# Altium PCB ESP32_Component.PcbDoc (part 2 of 2)
Units mm, origin at the board's own origin, x right, y up, seen from the top; angles counter-clockwise.
Board outline 90.17 x 95.89 mm, 4 copper layers (L1 (Signal), L2 (Ground), L3 (Ground), L4 (Signal)), stack 1.591 mm thick; 69 components, 61 nets, 348 pads, 1237 vias.
Unrouted connection lines stored in the file: 1.
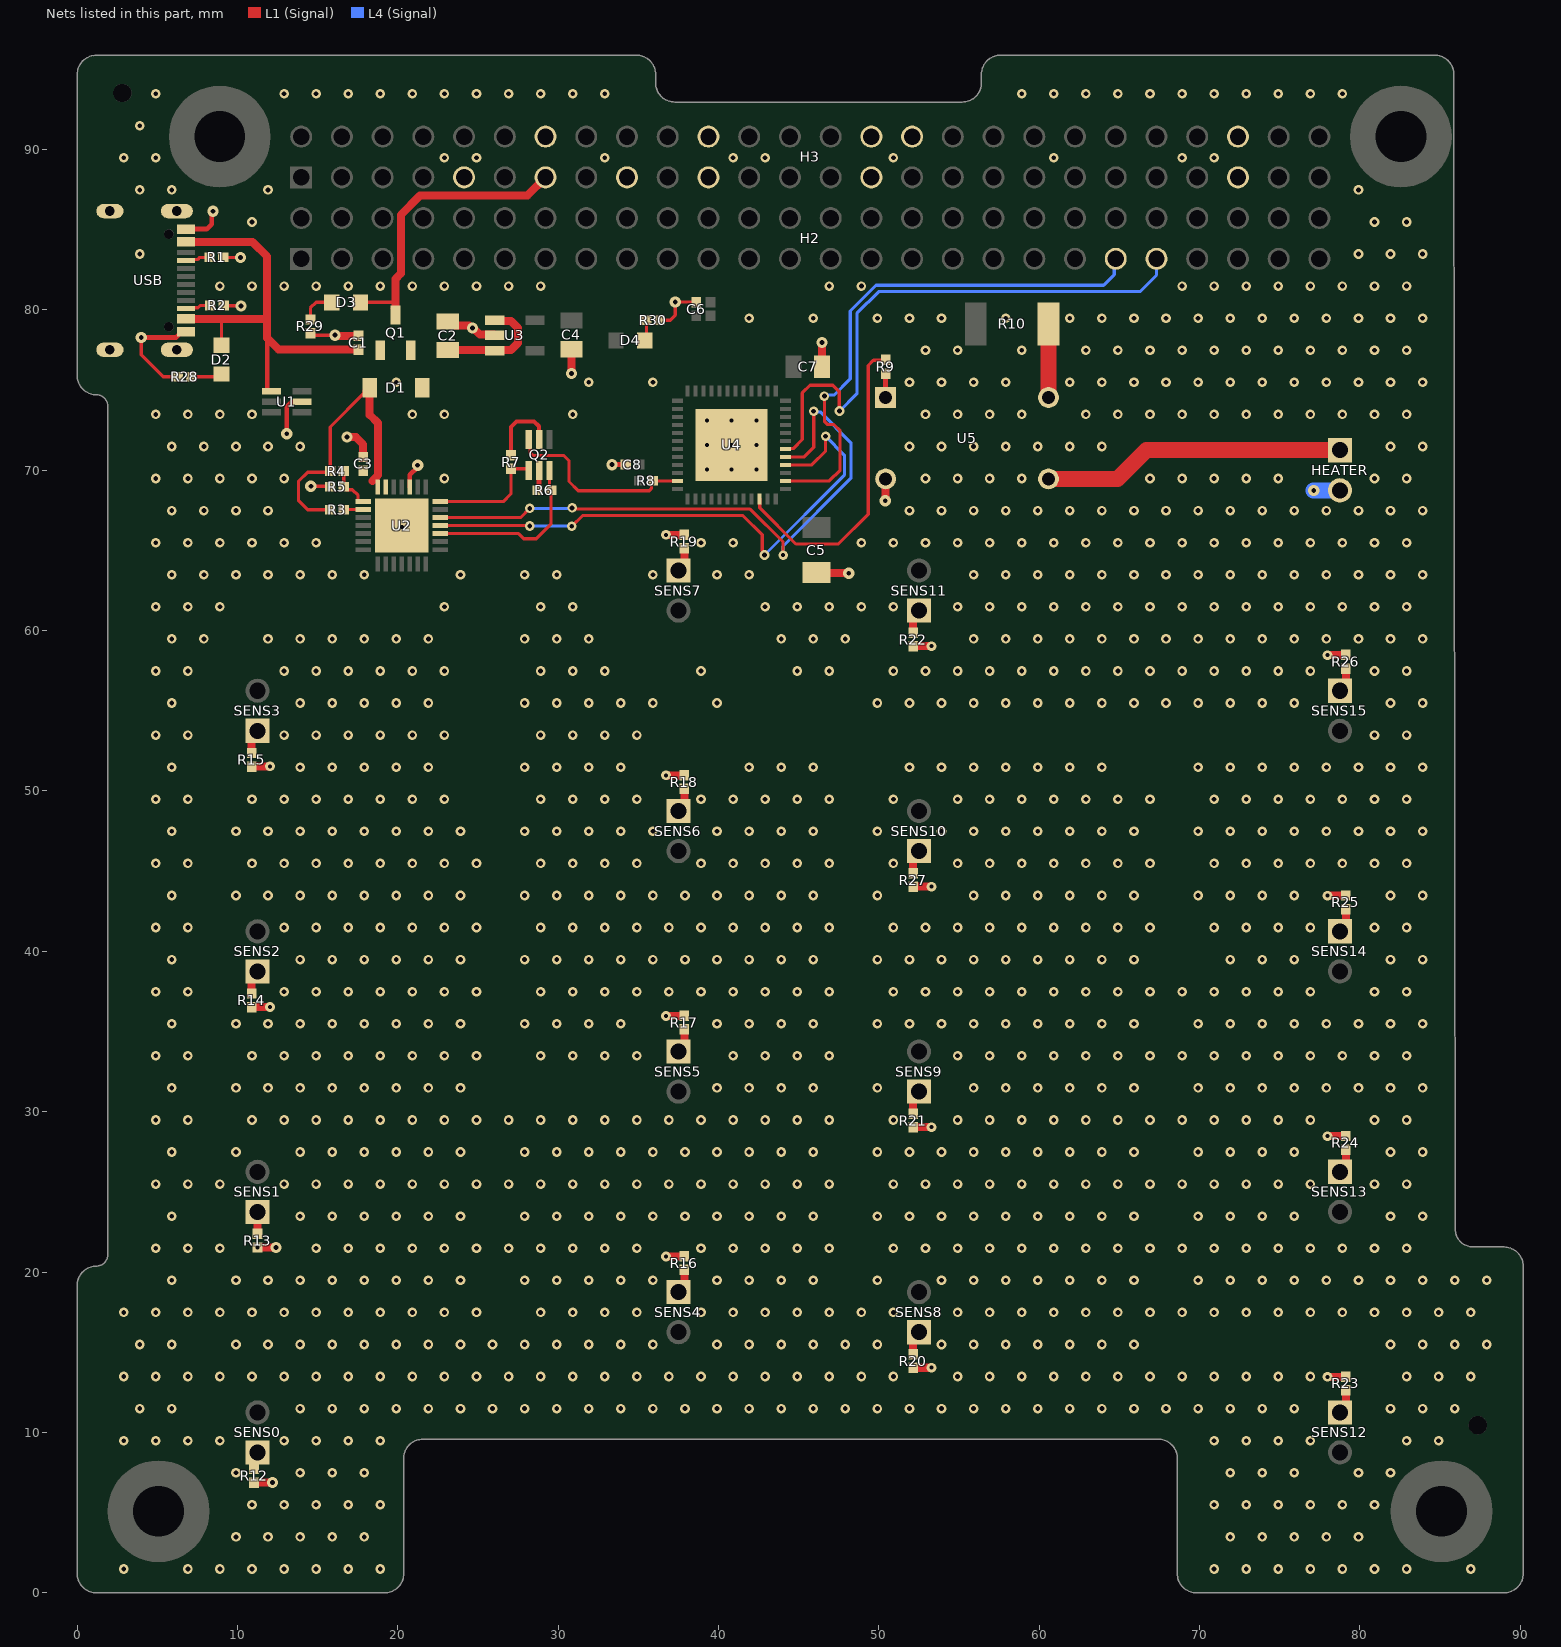
[diagram p4: the nets of this part, all layers, seen from the top]

## Via types
v1: diameter 0.6, hole 0.3, L1 (Signal) to L4 (Signal), tented both sides, 1149 vias
v2: diameter 0.6, hole 0.3, L1 (Signal) to L4 (Signal), 43 vias
v3: diameter 0.6, hole 0.25, L1 (Signal) to L4 (Signal), 26 vias
v4: diameter 0.7, hole 0.3, L1 (Signal) to L4 (Signal), 19 vias

## Nets (pads, with @x,y where several pads share a name; then routed paths per layer and width w, separated by ;. In a path a pad name is that pad's centre, name@x,y a point inside that pad or via, vN(x,y) a via of type N, cw(c..) or ccw(c..) an arc to the next point about the centre after c; other vN are vias at no path point) (continued)
GND: C1.2 C2.1 C3.2 C4.1 C5.2 C6.1 C7.1 C8.1 H3.09 H3.14 H3.17 H3.21 H3.22 H3.29 H3.30 H3.32 H3.47 H3.48 HEATER.2 R1.1 R2.1 R5.1 R12.2 R13.1 R14.1 R15.1 R16.1 R17.1 R18.1 R19.1 R20.1 R21.1 R22.1 R23.1 R24.1 R25.1 R26.1 R27.1 R28.1 R29.1 R30.1 U1.2 U2.3 U2.29 U3.2 U4.49 U5.2 USB.A1_B12 USB.B1_A12 USB.S1 USB.S2 USB.S3 USB.S4 | length 56
  L1 (Signal) w0.2: v4(4,78.275) 4,77.2 5.375,75.825 R28.1@6.275,75.825 ; R1.1@9.132,83.268 v4@10.179,83.268 ; R2.1@9.162,80.263 v4@10.212,80.263 ; R29.1@14.55,78.55 14.675,78.425 v4(16.075,78.425) ; v4(14.575,69) 15.746,69 R5.1@15.786,68.961 ; R30.1@36.35,79.35 36.358,79.358 36.983,79.358 37.3,79.675 v4(37.3,80.49) ; v4@37.31,80.49 38.597,80.49 C6.1@38.608,80.479
  L1 (Signal) w0.3: v4(4,78.275) 6.161,78.275 6.525,78.639 USB.B1_A12@6.795,78.639 ; USB.A1_B12@6.795,85.039 8.089,85.039 8.398,85.348 8.398,86.073 v4(8.475,86.15) ; R1.1@9.125,83.275 R1.1@9.132,83.268 ; R2.1@9.15,80.275 R2.1@9.162,80.263 ; v4@10.179,83.268 v4(10.186,83.261) ; v4@10.212,80.263 v4(10.225,80.25) ; v4(13.075,72.275) 13.075,73.955 13.345,74.225 13.985,74.225 U1.2@14.035,74.275 ; U2.3@20.744,68.948 20.744,69.708 21.234,70.199 v4(21.234,70.307) ; v4(33.351,70.35) 33.355,70.354 C8.1@34.198,70.354
  L1 (Signal) w0.5: R14.1@10.876,36.532 v3(12.026,36.532) ; R15.1@10.876,51.532 v3(12.026,51.532) ; R12.2@11.03,6.869 v4(12.18,6.869) ; v3(11.25,21.532) v4(12.4,21.532) ; v4(16.075,78.425) 16.129,78.425 16.177,78.378 C1.2@17.545,78.378 ; v4(16.825,72.075) 16.828,72.072 17.378,72.072 17.831,71.619 C3.2@17.831,70.827 ; C2.1@23.125,79.289 23.375,79.039 24.432,79.039 24.596,78.875 v4(24.65,78.875) 24.704,78.875 25.124,78.455 25.998,78.455 U3.2@26.043,78.41 ; v4@30.825,76.036 C4.1@30.825,77.542 ; C8.1@34.198,70.354 C8.1@34.202,70.358 ; v3(36.724,20.968) R16.1@37.874,20.968 ; v3(36.724,35.968) R17.1@37.874,35.968 ; v3(36.724,50.968) R18.1@37.874,50.968 ; v3(36.724,65.968) R19.1@37.874,65.968 ; C5.2@46.101,63.621 46.122,63.601 48.099,63.601 v4(48.12,63.58) ; v4(46.45,77.975) 46.451,77.974 46.451,76.453 C7.1@46.452,76.452 ; v4(50.396,68.095) 50.408,68.107 50.408,69.448 U5.2@50.42,69.46 ; R20.1@52.126,14.032 v3(53.276,14.032) ; R21.1@52.126,29.032 v3(53.276,29.032) ; R27.1@52.126,44.032 v3(53.276,44.032) ; R22.1@52.126,59.032 v3(53.276,59.032) ; v3(77.974,13.468) R23.1@79.124,13.468 ; v3(77.974,28.468) R24.1@79.124,28.468 ; v3(77.974,43.468) R25.1@79.124,43.468 ; v3(77.974,58.468) R26.1@79.124,58.468
  L1 (Signal) w1: HEATER.2@78.732,68.732 HEATER.2@78.75,68.75
  L4 (Signal) w1: v4(77.114,68.732) HEATER.2@78.732,68.732
  other v1: 2.905,1.482 6.905,1.482 8.905,1.482 10.905,1.482 12.905,1.482 14.905,1.482 16.905,1.482 18.905,1.482 70.905,1.482 72.905,1.482 74.905,1.482 76.905,1.482 78.905,1.482 80.905,1.482 82.905,1.482 86.905,1.482 9.905,3.482 11.905,3.482 13.905,3.482 15.905,3.482 17.905,3.482 71.905,3.482 73.905,3.482 75.905,3.482 77.905,3.482 79.905,3.482 10.905,5.482 12.905,5.482 14.905,5.482 16.905,5.482 18.905,5.482 70.905,5.482 72.905,5.482 74.905,5.482 76.905,5.482 78.905,5.482 80.905,5.482 9.905,7.482 13.905,7.482 15.905,7.482 17.905,7.482 71.905,7.482 73.905,7.482 75.905,7.482 79.905,7.482 81.905,7.482 2.905,9.482 4.905,9.482 6.905,9.482 8.905,9.482 12.905,9.482 14.905,9.482 16.905,9.482 18.905,9.482 70.905,9.482 72.905,9.482 74.905,9.482 76.905,9.482 82.905,9.482 84.905,9.482 3.905,11.482 5.905,11.482 13.905,11.482 15.905,11.482 17.905,11.482 19.905,11.482 21.905,11.482 23.905,11.482 25.905,11.482 27.905,11.482 29.905,11.482 31.905,11.482 33.905,11.482 35.905,11.482 37.905,11.482 39.905,11.482 41.905,11.482 43.905,11.482 45.905,11.482 47.905,11.482 49.905,11.482 51.905,11.482 53.905,11.482 55.905,11.482 57.905,11.482 59.905,11.482 61.905,11.482 63.905,11.482 65.905,11.482 67.905,11.482 69.905,11.482 71.905,11.482 73.905,11.482 75.905,11.482 81.905,11.482 83.905,11.482 85.905,11.482 2.905,13.482 4.905,13.482 6.905,13.482 8.905,13.482 10.905,13.482 12.905,13.482 14.905,13.482 16.905,13.482 18.905,13.482 20.905,13.482 22.905,13.482 24.905,13.482 26.905,13.482 28.905,13.482 30.905,13.482 32.905,13.482 34.905,13.482 36.905,13.482 38.905,13.482 40.905,13.482 42.905,13.482 44.905,13.482 46.905,13.482 48.905,13.482 50.905,13.482 54.905,13.482 56.905,13.482 58.905,13.482 60.905,13.482 62.905,13.482 64.905,13.482 66.905,13.482 68.905,13.482 70.905,13.482 72.905,13.482 74.905,13.482 76.905,13.482 82.905,13.482 84.905,13.482 86.905,13.482 3.905,15.482 5.905,15.482 9.905,15.482 11.905,15.482 13.905,15.482 15.905,15.482 17.905,15.482 19.905,15.482 21.905,15.482 23.905,15.482 25.905,15.482 27.905,15.482 29.905,15.482 31.905,15.482 33.905,15.482 35.905,15.482 39.905,15.482 41.905,15.482 43.905,15.482 45.905,15.482 47.905,15.482 49.905,15.482 53.905,15.482 55.905,15.482 57.905,15.482 59.905,15.482 61.905,15.482 63.905,15.482 65.905,15.482 81.905,15.482 83.905,15.482 85.905,15.482 87.905,15.482 2.905,17.482 4.905,17.482 6.905,17.482 8.905,17.482 10.905,17.482 12.905,17.482 14.905,17.482 16.905,17.482 18.905,17.482 20.905,17.482 22.905,17.482 24.905,17.482 28.905,17.482 30.905,17.482 32.905,17.482 34.905,17.482 38.905,17.482 40.905,17.482 42.905,17.482 44.905,17.482 46.905,17.482 48.905,17.482 50.905,17.482 54.905,17.482 56.905,17.482 58.905,17.482 60.905,17.482 62.905,17.482 64.905,17.482 66.905,17.482 68.905,17.482 70.905,17.482 72.905,17.482 74.905,17.482 76.905,17.482 78.905,17.482 80.905,17.482 82.905,17.482 84.905,17.482 86.905,17.482 5.905,19.482 9.905,19.482 11.905,19.482 13.905,19.482 15.905,19.482 17.905,19.482 19.905,19.482 21.905,19.482 23.905,19.482 27.905,19.482 29.905,19.482 31.905,19.482 33.905,19.482 35.905,19.482 39.905,19.482 41.905,19.482 43.905,19.482 45.905,19.482 49.905,19.482 53.905,19.482 55.905,19.482 57.905,19.482 59.905,19.482 61.905,19.482 63.905,19.482 65.905,19.482 69.905,19.482 71.905,19.482 73.905,19.482 75.905,19.482 77.905,19.482 79.905,19.482 81.905,19.482 83.905,19.482 85.905,19.482 87.905,19.482 4.905,21.482 6.905,21.482 8.905,21.482 14.905,21.482 16.905,21.482 18.905,21.482 20.905,21.482 22.905,21.482 24.905,21.482 26.905,21.482 28.905,21.482 30.905,21.482 32.905,21.482 34.905,21.482 38.905,21.482 40.905,21.482 42.905,21.482 44.905,21.482 46.905,21.482 50.905,21.482 52.905,21.482 54.905,21.482 56.905,21.482 58.905,21.482 60.905,21.482 62.905,21.482 64.905,21.482 66.905,21.482 68.905,21.482 70.905,21.482 72.905,21.482 74.905,21.482 76.905,21.482 78.905,21.482 80.905,21.482 82.905,21.482 5.905,23.482 13.905,23.482 15.905,23.482 17.905,23.482 19.905,23.482 21.905,23.482 23.905,23.482 27.905,23.482 29.905,23.482 31.905,23.482 33.905,23.482 35.905,23.482 37.905,23.482 39.905,23.482 41.905,23.482 43.905,23.482 45.905,23.482 49.905,23.482 51.905,23.482 53.905,23.482 55.905,23.482 57.905,23.482 59.905,23.482 61.905,23.482 63.905,23.482 65.905,23.482 69.905,23.482 71.905,23.482 73.905,23.482 75.905,23.482 81.905,23.482 83.905,23.482 4.905,25.482 6.905,25.482 8.905,25.482 12.905,25.482 14.905,25.482 16.905,25.482 18.905,25.482 20.905,25.482 22.905,25.482 24.905,25.482 26.905,25.482 28.905,25.482 30.905,25.482 32.905,25.482 34.905,25.482 36.905,25.482 38.905,25.482 40.905,25.482 42.905,25.482 44.905,25.482 46.905,25.482 50.905,25.482 52.905,25.482 54.905,25.482 56.905,25.482 58.905,25.482 60.905,25.482 62.905,25.482 64.905,25.482 66.905,25.482 68.905,25.482 70.905,25.482 72.905,25.482 74.905,25.482 76.905,25.482 80.905,25.482 82.905,25.482 5.905,27.482 9.905,27.482 13.905,27.482 15.905,27.482 17.905,27.482 19.905,27.482 21.905,27.482 23.905,27.482 27.905,27.482 29.905,27.482 31.905,27.482 33.905,27.482 35.905,27.482 37.905,27.482 39.905,27.482 41.905,27.482 43.905,27.482 45.905,27.482 49.905,27.482 51.905,27.482 53.905,27.482 55.905,27.482 57.905,27.482 59.905,27.482 61.905,27.482 63.905,27.482 65.905,27.482 69.905,27.482 71.905,27.482 73.905,27.482 75.905,27.482 81.905,27.482 83.905,27.482 4.905,29.482 6.905,29.482 10.905,29.482 12.905,29.482 14.905,29.482 16.905,29.482 18.905,29.482 20.905,29.482 22.905,29.482 24.905,29.482 26.905,29.482 28.905,29.482 30.905,29.482 32.905,29.482 34.905,29.482 36.905,29.482 38.905,29.482 40.905,29.482 42.905,29.482 44.905,29.482 46.905,29.482 50.905,29.482 54.905,29.482 56.905,29.482 58.905,29.482 60.905,29.482 62.905,29.482 64.905,29.482 66.905,29.482 68.905,29.482 70.905,29.482 72.905,29.482 74.905,29.482 76.905,29.482 80.905,29.482 82.905,29.482 5.905,31.482 9.905,31.482 11.905,31.482 13.905,31.482 15.905,31.482 17.905,31.482 19.905,31.482 21.905,31.482 23.905,31.482 39.905,31.482 41.905,31.482 43.905,31.482 45.905,31.482 49.905,31.482 55.905,31.482 57.905,31.482 59.905,31.482 61.905,31.482 63.905,31.482 65.905,31.482 69.905,31.482 71.905,31.482 73.905,31.482 75.905,31.482 77.905,31.482 79.905,31.482 81.905,31.482 83.905,31.482 4.905,33.482 6.905,33.482 10.905,33.482 12.905,33.482 14.905,33.482 16.905,33.482 18.905,33.482 20.905,33.482 22.905,33.482 24.905,33.482 28.905,33.482 30.905,33.482 32.905,33.482 34.905,33.482 40.905,33.482 42.905,33.482 44.905,33.482 46.905,33.482 54.905,33.482 56.905,33.482 58.905,33.482 60.905,33.482 62.905,33.482 64.905,33.482 66.905,33.482 68.905,33.482 70.905,33.482 72.905,33.482 74.905,33.482 76.905,33.482 78.905,33.482 80.905,33.482 82.905,33.482 5.905,35.482 9.905,35.482 11.905,35.482 13.905,35.482 15.905,35.482 17.905,35.482 19.905,35.482 21.905,35.482 23.905,35.482 27.905,35.482 29.905,35.482 31.905,35.482 33.905,35.482 39.905,35.482 41.905,35.482 43.905,35.482 45.905,35.482 49.905,35.482 51.905,35.482 53.905,35.482 55.905,35.482 57.905,35.482 59.905,35.482 61.905,35.482 63.905,35.482 65.905,35.482 69.905,35.482 71.905,35.482 73.905,35.482 75.905,35.482 77.905,35.482 79.905,35.482 81.905,35.482 83.905,35.482 4.905,37.482 6.905,37.482 12.905,37.482 14.905,37.482 16.905,37.482 18.905,37.482 20.905,37.482 22.905,37.482 24.905,37.482 28.905,37.482 30.905,37.482 32.905,37.482 34.905,37.482 36.905,37.482 38.905,37.482 40.905,37.482 42.905,37.482 44.905,37.482 46.905,37.482 50.905,37.482 52.905,37.482 54.905,37.482 56.905,37.482 58.905,37.482 60.905,37.482 62.905,37.482 64.905,37.482 66.905,37.482 68.905,37.482 70.905,37.482 72.905,37.482 74.905,37.482 76.905,37.482 80.905,37.482 82.905,37.482 5.905,39.482 13.905,39.482 15.905,39.482 17.905,39.482 19.905,39.482 21.905,39.482 23.905,39.482 27.905,39.482 29.905,39.482 31.905,39.482 33.905,39.482 35.905,39.482 37.905,39.482 39.905,39.482 41.905,39.482 43.905,39.482 45.905,39.482 49.905,39.482 51.905,39.482 53.905,39.482 55.905,39.482 57.905,39.482 59.905,39.482 61.905,39.482 63.905,39.482 65.905,39.482 71.905,39.482 73.905,39.482 75.905,39.482 81.905,39.482 83.905,39.482 4.905,41.482 6.905,41.482 12.905,41.482 14.905,41.482 16.905,41.482 18.905,41.482 20.905,41.482 22.905,41.482 24.905,41.482 28.905,41.482 30.905,41.482 32.905,41.482 34.905,41.482 36.905,41.482 38.905,41.482 40.905,41.482 42.905,41.482 44.905,41.482 46.905,41.482 50.905,41.482 52.905,41.482 54.905,41.482 56.905,41.482 58.905,41.482 60.905,41.482 62.905,41.482 64.905,41.482 66.905,41.482 70.905,41.482 72.905,41.482 74.905,41.482 76.905,41.482 80.905,41.482 82.905,41.482 5.905,43.482 9.905,43.482 11.905,43.482 13.905,43.482 15.905,43.482 17.905,43.482 19.905,43.482 21.905,43.482 23.905,43.482 27.905,43.482 29.905,43.482 31.905,43.482 33.905,43.482 35.905,43.482 37.905,43.482 39.905,43.482 41.905,43.482 43.905,43.482 45.905,43.482 49.905,43.482 55.905,43.482 57.905,43.482 59.905,43.482 61.905,43.482 63.905,43.482 65.905,43.482 69.905,43.482 71.905,43.482 73.905,43.482 75.905,43.482 81.905,43.482 83.905,43.482 4.905,45.482 6.905,45.482 10.905,45.482 12.905,45.482 14.905,45.482 16.905,45.482 18.905,45.482 20.905,45.482 22.905,45.482 24.905,45.482 28.905,45.482 30.905,45.482 32.905,45.482 34.905,45.482 38.905,45.482 40.905,45.482 42.905,45.482 44.905,45.482 46.905,45.482 50.905,45.482 54.905,45.482 56.905,45.482 58.905,45.482 60.905,45.482 62.905,45.482 64.905,45.482 66.905,45.482 70.905,45.482 72.905,45.482 74.905,45.482 76.905,45.482 78.905,45.482 80.905,45.482 82.905,45.482 5.905,47.482 9.905,47.482 11.905,47.482 13.905,47.482 15.905,47.482 17.905,47.482 19.905,47.482 21.905,47.482 23.905,47.482 27.905,47.482 29.905,47.482 31.905,47.482 33.905,47.482 35.905,47.482 39.905,47.482 41.905,47.482 43.905,47.482 45.905,47.482 49.905,47.482 53.905,47.482 55.905,47.482 57.905,47.482 59.905,47.482 61.905,47.482 63.905,47.482 65.905,47.482 69.905,47.482 71.905,47.482 73.905,47.482 75.905,47.482 77.905,47.482 79.905,47.482 81.905,47.482 83.905,47.482 4.905,49.482 6.905,49.482 10.905,49.482 12.905,49.482 14.905,49.482 16.905,49.482 18.905,49.482 20.905,49.482 22.905,49.482 28.905,49.482 30.905,49.482 32.905,49.482 34.905,49.482 38.905,49.482 40.905,49.482 42.905,49.482 44.905,49.482 46.905,49.482 50.905,49.482 54.905,49.482 56.905,49.482 58.905,49.482 60.905,49.482 62.905,49.482 64.905,49.482 66.905,49.482 70.905,49.482 72.905,49.482 74.905,49.482 76.905,49.482 78.905,49.482 80.905,49.482 82.905,49.482 5.905,51.482 13.905,51.482 15.905,51.482 17.905,51.482 19.905,51.482 21.905,51.482 27.905,51.482 29.905,51.482 31.905,51.482 33.905,51.482 41.905,51.482 43.905,51.482 45.905,51.482 51.905,51.482 53.905,51.482 55.905,51.482 57.905,51.482 59.905,51.482 61.905,51.482 63.905,51.482 69.905,51.482 71.905,51.482 73.905,51.482 75.905,51.482 77.905,51.482 79.905,51.482 81.905,51.482 83.905,51.482 4.905,53.482 6.905,53.482 12.905,53.482 14.905,53.482 16.905,53.482 18.905,53.482 20.905,53.482 22.905,53.482 28.905,53.482 30.905,53.482 32.905,53.482 34.905,53.482 80.905,53.482 82.905,53.482 5.905,55.482 13.905,55.482 15.905,55.482 17.905,55.482 19.905,55.482 21.905,55.482 27.905,55.482 29.905,55.482 31.905,55.482 33.905,55.482 35.905,55.482 39.905,55.482 49.905,55.482 51.905,55.482 53.905,55.482 55.905,55.482 57.905,55.482 59.905,55.482 61.905,55.482 63.905,55.482 65.905,55.482 67.905,55.482 69.905,55.482 71.905,55.482 73.905,55.482 75.905,55.482 81.905,55.482 83.905,55.482 4.905,57.482 6.905,57.482 12.905,57.482 14.905,57.482 16.905,57.482 18.905,57.482 20.905,57.482 22.905,57.482 28.905,57.482 30.905,57.482 32.905,57.482 38.905,57.482 44.905,57.482 46.905,57.482 50.905,57.482 52.905,57.482 54.905,57.482 56.905,57.482 58.905,57.482 60.905,57.482 62.905,57.482 64.905,57.482 66.905,57.482 68.905,57.482 70.905,57.482 72.905,57.482 74.905,57.482 76.905,57.482 80.905,57.482 82.905,57.482 5.905,59.482 7.905,59.482 11.905,59.482 13.905,59.482 15.905,59.482 17.905,59.482 19.905,59.482 21.905,59.482 27.905,59.482 29.905,59.482 31.905,59.482 43.905,59.482 45.905,59.482 47.905,59.482 55.905,59.482 57.905,59.482 59.905,59.482 61.905,59.482 63.905,59.482 65.905,59.482 67.905,59.482 69.905,59.482 71.905,59.482 73.905,59.482 75.905,59.482 77.905,59.482 79.905,59.482 81.905,59.482 83.905,59.482 4.905,61.482 6.905,61.482 8.905,61.482 22.905,61.482 28.905,61.482 30.905,61.482 42.905,61.482 44.905,61.482 46.905,61.482 48.905,61.482 50.905,61.482 54.905,61.482 56.905,61.482 58.905,61.482 60.905,61.482 62.905,61.482 64.905,61.482 66.905,61.482 68.905,61.482 70.905,61.482 72.905,61.482 74.905,61.482 76.905,61.482 78.905,61.482 80.905,61.482 82.905,61.482 5.905,63.482 7.905,63.482 9.905,63.482 11.905,63.482 13.905,63.482 15.905,63.482 17.905,63.482 23.905,63.482 27.905,63.482 29.905,63.482 35.905,63.482 39.905,63.482 41.905,63.482 55.905,63.482 57.905,63.482 59.905,63.482 61.905,63.482 63.905,63.482 65.905,63.482 67.905,63.482 69.905,63.482 71.905,63.482 73.905,63.482 75.905,63.482 77.905,63.482 79.905,63.482 81.905,63.482 83.905,63.482 4.905,65.482 6.905,65.482 8.905,65.482 10.905,65.482 12.905,65.482 14.905,65.482 38.905,65.482 40.905,65.482 48.905,65.482 50.905,65.482 52.905,65.482 54.905,65.482 56.905,65.482 58.905,65.482 60.905,65.482 62.905,65.482 64.905,65.482 66.905,65.482 68.905,65.482 70.905,65.482 72.905,65.482 74.905,65.482 76.905,65.482 78.905,65.482 80.905,65.482 82.905,65.482 5.905,67.482 7.905,67.482 9.905,67.482 11.905,67.482 51.905,67.482 53.905,67.482 55.905,67.482 57.905,67.482 59.905,67.482 61.905,67.482 63.905,67.482 65.905,67.482 67.905,67.482 69.905,67.482 71.905,67.482 73.905,67.482 75.905,67.482 77.905,67.482 79.905,67.482 81.905,67.482 83.905,67.482 4.905,69.482 6.905,69.482 8.905,69.482 10.905,69.482 12.905,69.482 22.905,69.482 52.905,69.482 54.905,69.482 56.905,69.482 58.905,69.482 66.905,69.482 68.905,69.482 70.905,69.482 72.905,69.482 74.905,69.482 80.905,69.482 82.905,69.482 5.905,71.482 7.905,71.482 9.905,71.482 11.905,71.482 13.905,71.482 51.905,71.482 53.905,71.482 55.905,71.482 57.905,71.482 59.905,71.482 61.905,71.482 63.905,71.482 81.905,71.482 83.905,71.482 4.905,73.482 6.905,73.482 8.905,73.482 10.905,73.482 20.905,73.482 22.905,73.482 30.905,73.482 52.905,73.482 54.905,73.482 56.905,73.482 58.905,73.482 62.905,73.482 64.905,73.482 66.905,73.482 68.905,73.482 70.905,73.482 72.905,73.482 74.905,73.482 76.905,73.482 78.905,73.482 80.905,73.482 82.905,73.482 19.905,75.482 31.905,75.482 35.905,75.482 51.905,75.482 53.905,75.482 55.905,75.482 57.905,75.482 61.905,75.482 63.905,75.482 65.905,75.482 67.905,75.482 69.905,75.482 71.905,75.482 73.905,75.482 75.905,75.482 77.905,75.482 79.905,75.482 81.905,75.482 83.905,75.482 52.905,77.482 54.905,77.482 58.905,77.482 62.905,77.482 64.905,77.482 66.905,77.482 68.905,77.482 70.905,77.482 72.905,77.482 74.905,77.482 76.905,77.482 78.905,77.482 80.905,77.482 82.905,77.482 41.905,79.482 45.905,79.482 49.905,79.482 51.905,79.482 53.905,79.482 57.905,79.482 61.905,79.482 63.905,79.482 65.905,79.482 67.905,79.482 69.905,79.482 71.905,79.482 73.905,79.482 75.905,79.482 77.905,79.482 79.905,79.482 81.905,79.482 83.905,79.482 8.905,81.482 10.905,81.482 12.905,81.482 14.905,81.482 16.905,81.482 18.905,81.482 20.905,81.482 22.905,81.482 24.905,81.482 26.905,81.482 28.905,81.482 46.905,81.482 48.905,81.482 68.905,81.482 70.905,81.482 72.905,81.482 74.905,81.482 76.905,81.482 78.905,81.482 80.905,81.482 82.905,81.482 3.905,83.482 79.905,83.482 81.905,83.482 83.905,83.482 10.905,85.482 80.905,85.482 82.905,85.482 3.905,87.482 5.905,87.482 11.905,87.482 79.905,87.482 2.905,89.482 4.905,89.482 22.905,89.482 24.905,89.482 32.905,89.482 40.905,89.482 42.905,89.482 50.905,89.482 60.905,89.482 68.905,89.482 70.905,89.482 3.905,91.482 4.905,93.482 12.905,93.482 14.905,93.482 16.905,93.482 18.905,93.482 20.905,93.482 22.905,93.482 24.905,93.482 26.905,93.482 28.905,93.482 30.905,93.482 32.905,93.482 58.905,93.482 60.905,93.482 62.905,93.482 64.905,93.482 66.905,93.482 68.905,93.482 70.905,93.482 72.905,93.482 74.905,93.482 76.905,93.482 78.905,93.482
  other v3: 20.244,66.448 39.293,70.06 40.817,70.06 42.37,70.06 39.293,71.584 40.817,71.584 42.37,71.584 39.293,73.108 40.817,73.108 42.37,73.108
  other v4: 30.821,76.032
IO0: Q2.6 R8.1 U4.23 | length 12.3
  L1 (Signal) w0.2: Q2.6@28.16,71.912 28.233,71.839 28.233,71.117 28.436,70.914 30.361,70.914 30.675,70.6 30.675,69.3 31.253,68.722 35.672,68.722 35.809,68.859 35.809,69.249 R8.1@35.902,69.342 36.029,69.342 36.035,69.336 37.45,69.336 U4.23@37.452,69.334
Net2_8: R4.1 R5.2 U2.8 | length 2.8
  L1 (Signal) w0.2: R4.1@16.63,69.952 16.63,68.966 16.812,68.784 17.166,68.784 17.519,68.431 17.519,68.098 17.569,68.048 U2.8@17.844,68.048
Net2_9: R3.1 U2.9 | length 1.2
  L1 (Signal) w0.2: R3.1@16.637,67.539 16.646,67.548 U2.9@17.844,67.548
Net2_24: Q2.3 R6.2 U2.24 | length 10.8
  L1 (Signal) w0.2: U2.24@22.644,66.048 27.527,66.048 27.85,65.725 28.625,65.725 29.558,66.658 R6.2@29.558,68.742 29.46,68.84 Q2.3@29.46,69.992
Net2_28: Q2.1 R7.2 U2.28 | length 7.3
  L1 (Signal) w0.2: U2.28@22.644,68.048 26.573,68.048 27.055,68.53 27.055,70.086 R7.2@27.057,70.088 28.063,70.088 Q2.1@28.16,69.992
NetC2_2: C2.2 D1.1 Q1.2 U3.1 U3.3 | length 7.2
  L1 (Signal) w0.5: C2.2@23.125,77.511 23.151,77.485 26.018,77.485 U3.3@26.043,77.46 26.088,77.505 27.062,77.505 27.498,77.941 27.498,78.878 27.062,79.315 26.088,79.315 U3.1@26.043,79.36
NetD2_1: D2.1 R28.2 | length 1.9
  L1 (Signal) w0.2: R28.2@7.125,75.825 8.825,75.825 D2.1@9,76
NetD3_1: D3.1 R29.2 | length 2.2
  L1 (Signal) w0.2: R29.2@14.55,79.4 14.55,80.125 14.9,80.475 D3.1@15.875,80.475
NetD4_1: D4.1 R30.2 | length 1.3
  L1 (Signal) w0.2: D4.1@35.4,78.1 35.5,78.2 R30.2@35.5,79.35
NetH1_A5: R1.2 USB.A5 | length 1.6
  L1 (Signal) w0.2: USB.A5@6.795,83.089 6.845,83.139 7.514,83.139 7.65,83.275 R1.2@8.275,83.275
NetH1_B5: R2.2 USB.B5 | length 1.6
  L1 (Signal) w0.2: USB.B5@6.795,80.089 6.845,80.139 7.539,80.139 7.675,80.275 R2.2@8.3,80.275
NetH4_1: HEATER.1 U5.3 | length 18.9
  L1 (Signal) w1: U5.3@60.58,69.46 64.885,69.46 66.675,71.25 HEATER.1@78.75,71.25
NetH5_1: R12.1 SENS0.1 | length 1.8
  L1 (Signal) w0.5: R12.1@11.03,7.719 11.03,9.1 SENS0.1@11.4,9.1
NetH6_1: R13.2 SENS1.1 | length 1.8
  L1 (Signal) w0.5: R13.2@11.254,22.369 11.254,23.75 SENS1.1@11.624,23.75
NetH7_1: R14.2 SENS2.1 | length 1.8
  L1 (Signal) w0.5: R14.2@10.88,37.369 10.88,38.75 SENS2.1@11.25,38.75
NetH8_1: R15.2 SENS3.1 | length 1.8
  L1 (Signal) w0.5: R15.2@10.88,52.369 10.88,53.75 SENS3.1@11.25,53.75
NetH9_1: R16.2 SENS4.1 | length 1.8
  L1 (Signal) w0.5: SENS4.1@37.5,18.75 37.87,18.75 R16.2@37.87,20.131
NetH10_1: R17.2 SENS5.1 | length 1.8
  L1 (Signal) w0.5: SENS5.1@37.5,33.75 37.87,33.75 R17.2@37.87,35.131
NetH11_1: R18.2 SENS6.1 | length 1.8
  L1 (Signal) w0.5: SENS6.1@37.5,48.75 37.87,48.75 R18.2@37.87,50.131
NetH12_1: R19.2 SENS7.1 | length 1.8
  L1 (Signal) w0.5: SENS7.1@37.5,63.75 37.87,63.75 R19.2@37.87,65.131
NetH13_1: R20.2 SENS8.1 | length 1.8
  L1 (Signal) w0.5: R20.2@52.13,14.869 52.13,16.25 SENS8.1@52.5,16.25
NetH14_1: R21.2 SENS9.1 | length 1.8
  L1 (Signal) w0.5: R21.2@52.13,29.869 52.13,31.25 SENS9.1@52.5,31.25
NetH15_1: R27.2 SENS10.1 | length 1.8
  L1 (Signal) w0.5: R27.2@52.13,44.869 52.13,46.25 SENS10.1@52.5,46.25
NetH16_1: R22.2 SENS11.1 | length 1.5
  L1 (Signal) w0.5: R22.2@52.13,59.869 52.13,60.88 SENS11.1@52.5,61.25
NetH17_1: R23.2 SENS12.1 | length 1.8
  L1 (Signal) w0.5: SENS12.1@78.75,11.25 79.12,11.25 R23.2@79.12,12.631
NetH18_1: R24.2 SENS13.1 | length 1.8
  L1 (Signal) w0.5: SENS13.1@78.75,26.25 79.12,26.25 R24.2@79.12,27.631
NetH19_1: R25.2 SENS14.1 | length 1.8
  L1 (Signal) w0.5: SENS14.1@78.75,41.25 79.12,41.25 R25.2@79.12,42.631
NetH20_1: R26.2 SENS15.1 | length 1.8
  L1 (Signal) w0.5: SENS15.1@78.75,56.25 79.12,56.25 R26.2@79.12,57.631
NetQ2_2: Q2.2 R6.1 | length 1.3
  L1 (Signal) w0.3: R6.1@28.708,68.742 28.81,68.843 Q2.2@28.81,69.992
NetQ2_5: Q2.5 R7.1 | length 4.6
  L1 (Signal) w0.254: R7.1@27.057,70.938 27.057,72.699 27.408,73.05 28.5,73.05 28.806,72.744 28.806,71.916 Q2.5@28.81,71.912
NetR9_2: R9.2 U5.1 | length 1.5
  L1 (Signal) w0.3: R9.2@50.419,76.029 50.419,74.541 U5.1@50.42,74.54
NetR10_1: R10.1 U5.4 | length 4.6
  L1 (Signal) w1: U5.4@60.579,74.541 R10.1@60.579,79.121
PWM: R9.1 U4.34 | length 19.5
  L1 (Signal) w0.2: U4.34@42.567,68.219 42.567,67.658 44.825,65.4 47.476,65.4 49.334,67.258 49.334,76.534 49.654,76.854 50.394,76.854 R9.1@50.419,76.879
RXD: U2.25 U4.40 | length 35.9
  L1 (Signal) w0.2: U2.25@22.644,66.548 28.202,66.548 v2(28.23,66.52) ; v2(30.85,66.51) 31.519,67.179 41.521,67.179 42.725,65.975 42.725,64.966 42.866,64.825 v2(42.866,64.716) ; U4.40@44.182,70.334 44.184,70.332 45.807,70.332 46.674,71.199 v2(46.674,72.123)
  L4 (Signal) w0.2: v2(28.23,66.52) 28.235,66.515 30.845,66.515 v2(30.85,66.51) ; v2(42.866,64.716) 47.85,69.7 47.85,70.947 v2(46.674,72.123)
SCL: H2.43 U4.42 | length 35.3
  L1 (Signal) w0.2: U4.42@44.182,71.334 44.199,71.351 44.654,71.351 45.222,71.919 45.222,74.822 45.7,75.3 47.125,75.3 47.529,74.896 47.529,73.713 v2(47.545,73.696)
  L4 (Signal) w0.2: v2(47.545,73.696) 48.625,74.777 48.625,79.779 49.986,81.14 66.281,81.14 67.31,82.169 H2.43@67.31,83.185
SDA: H2.41 U4.38 | length 33.7
  L1 (Signal) w0.2: U4.38@44.182,69.334 46.909,69.334 47.58,70.005 47.58,72.47 47.2,72.85 46.8,72.85 46.6,73.05 v2(46.6,74.625)
  L4 (Signal) w0.2: v2(46.6,74.625) 46.665,74.69 47.2,74.69 48.21,75.7 48.21,79.93 49.82,81.54 64.014,81.54 64.674,82.2 64.674,83.089 H2.41@64.77,83.185
TXD: U2.26 U4.41 | length 39.5
  L1 (Signal) w0.2: U2.26@22.644,67.048 27.648,67.048 v2(28.22,67.62) ; v2(30.87,67.65) 30.941,67.579 41.969,67.579 44.025,65.524 v3(44.025,64.7) ; U4.41@44.182,70.834 45.338,70.834 45.932,71.428 45.932,73.668 v2(45.925,73.675)
  L4 (Signal) w0.2: v2(28.22,67.62) 30.84,67.62 v2(30.87,67.65) ; v3(44.025,64.7) 44.025,65.275 48.25,69.5 48.25,71.725 46.337,73.638 45.962,73.638 v2(45.925,73.675)
VBUS: D3.2 H3.13 Q1.3 | length 18.9
  L1 (Signal) w0.2: D3.2@17.675,80.475 19.806,80.475 19.856,80.525 ; Q1.3@19.656,80.096 Q1.3@19.856,79.896
  L1 (Signal) w0.5: Q1.3@19.856,79.688 19.856,79.896 19.856,80.525 19.856,81.934 20.185,82.263 20.185,85.925 21.39,87.13 28.075,87.13 H3.13@29.21,88.265
VUSB: C1.1 C3.1 D1.2 D2.2 Q1.1 R3.2 R4.2 U1.4 U2.6 U2.7 USB.A4_B9 USB.B4_A9 | length 44.4
  L1 (Signal) w0.2: D2.2@9,77.8 9,79.44 ; 11.846,81.15 11.852,81.156 ; R3.2@15.787,67.539 14.386,67.539 13.8,68.125 13.8,69.3 14.375,69.875 15.704,69.875 R4.2@15.78,69.952 15.78,72.695 D1.2@17.884,74.799
  L1 (Signal) w0.3: 11.852,78.248 11.852,74.975 11.902,74.925 U1.4@12.115,74.925
  L1 (Signal) w0.5: USB.A4_B9@6.795,84.239 10.936,84.239 11.852,83.323 11.852,81.156 11.852,79.44 ; USB.B4_A9@6.795,79.439 9,79.44 11.852,79.44 ; C1.1@17.545,77.528 12.572,77.528 11.852,78.248 11.852,79.44 ; D1.2@18.036,74.799 18.036,74.951 D1.2@18.243,75.159 ; D1.2@18.243,74.799 18.243,73.46 18.763,72.941 18.763,69.69 18.415,69.342
pads on no net: H2.01 H2.02 H2.03 H2.04 H2.05 H2.06 H2.07 H2.08 H2.09 H2.10 H2.11 H2.12 H2.13 H2.14 H2.15 H2.16 H2.17 H2.18 H2.19 H2.20 H2.21 H2.22 H2.23 H2.24 H2.25 H2.26 H2.27 H2.28 H2.29 H2.30 H2.31 H2.32 H2.33 H2.34 H2.35 H2.36 H2.37 H2.38 H2.39 H2.40 H2.42 H2.44 H2.45 H2.46 H2.47 H2.48 H2.49 H2.50 H2.51 H2.52 H3.01 H3.02 H3.03 H3.04 H3.05 H3.06 H3.07 H3.08 H3.10 H3.11 H3.12 H3.15 H3.16 H3.18 H3.19 H3.20 H3.23 H3.24 H3.26 H3.27 H3.28 H3.31 H3.33 H3.34 H3.35 H3.36 H3.37 H3.38 H3.39 H3.40 H3.41 H3.42 H3.43 H3.44 H3.45 H3.46 H3.49 H3.50 H3.51 H3.52 U1.5 U1.6 U2.1 U2.2 U2.10 U2.11 U2.12 U2.13 U2.14 U2.15 U2.16 U2.17 U2.18 U2.19 U2.20 U2.21 U2.22 U2.23 U2.27 U3.4 U4.2 U4.21 U4.22 U4.25 U4.26 U4.27 U4.28 U4.29 U4.30 U4.31 U4.32 U4.33 U4.35 U4.36 U4.44 U4.45 U4.47 U4.48 USB. USB.A8 USB.B8

## Polygon pours and split planes (outlines as drawn)
NetC2_2 on L1 (Signal) "NETC2_2_L01_P007" (solid, pour order 7): 20.407,78.191 20.407,76.286 20.915,75.778 20.915,74.381 22.185,74.381 22.185,76.159 22.947,76.921 24.025,76.921 24.025,78.191
VUSB on L1 (Signal) "VUSB_L01_P006" (solid, pour order 6): 17.105,77.81 18.121,77.81 18.502,78.191 19.391,78.191 19.391,76.286 18.883,75.778 18.883,74.381 17.613,74.381 17.613,75.778 17.105,76.286
3V3 on L1 (Signal) "3V3_L01_P009" (solid, pour order 9): 41.91,74.6 42.799,74.6 42.799,75.311 43.307,75.311 43.307,74.6 43.76,74.6 43.76,75.256 44.196,75.692 45.212,75.692 45.212,77.216 43.815,77.216 41.91,75.311
VUSB on L1 (Signal) "VUSB_L01_P003" (solid, pour order 3): 19.431,68.428 18.593,68.428 18.415,68.428 17.374,69.444 17.374,70.307 18.212,70.307 18.974,69.774 19.431,69.444
GND on L2 (Ground) "GND_L02_P000" (solid, pour order 0): 0.914,1.321 0.914,0.838 19.583,0.838 19.583,10.185 69.469,10.185 69.469,0.838 89.306,0.838 89.306,20.523 84.861,20.523 84.861,94.793 57.587,94.793 57.587,92.278 35.204,92.278 35.129,95.099 1.143,95.099 1.18,75.989 3.327,75.989 3.327,19.228 0.914,19.228
GND on L3 (Ground) "GND_L03_P002" (solid, pour order 2): 0.914,1.321 0.914,0.838 19.583,0.838 19.583,10.185 69.469,10.185 69.469,0.838 89.306,0.838 89.306,20.523 84.861,20.523 84.861,94.793 57.587,94.793 57.587,92.278 35.204,92.278 35.129,95.099 1.143,95.099 1.18,75.989 3.327,75.989 3.327,19.228 0.914,19.228

## Silkscreen, mask and mechanical layers (free items; w line width, h text height)
Top Overlay:
  text "Cal Poly Pomona" at 3.442,72.975 h1.25 r270
  text "CubeSTEP Research" at 5.675,72.625 h3 r270
  text "2023" at 3.442,26.873 h1.25 r270
Bottom Overlay:
  text "Professor Navid Nakhjiri /  / Basil Aranda / Nelson Chong / Daniella Dorantes / Chris Garner / David Hyatt / Benjamin James / Raymond Lee / Andrew Lombera / Jason Luc / Xavier Luna / Lachlan Mccarthy / Marissa Miranda / Diego Ramirez / Fateme Tahmak / Ali Uysal" at 75.5,11.777 h1.25

## Text inside footprints (layer, text, board x,y; h text height)
USB: Top 3D Body "PCB EDGE" at 0.145,76.639 h0.61 r270